# Altium PCB PCB1.PcbDoc
Units mil, origin at the board's own origin, x right, y up, seen from the top; angles counter-clockwise.
Board outline 7215.25 x 12370.99 mil, 2 copper layers (Top Layer, Bottom Layer), stack 23.2 mil thick; 54 components, 36 nets, 195 pads, 78 vias.
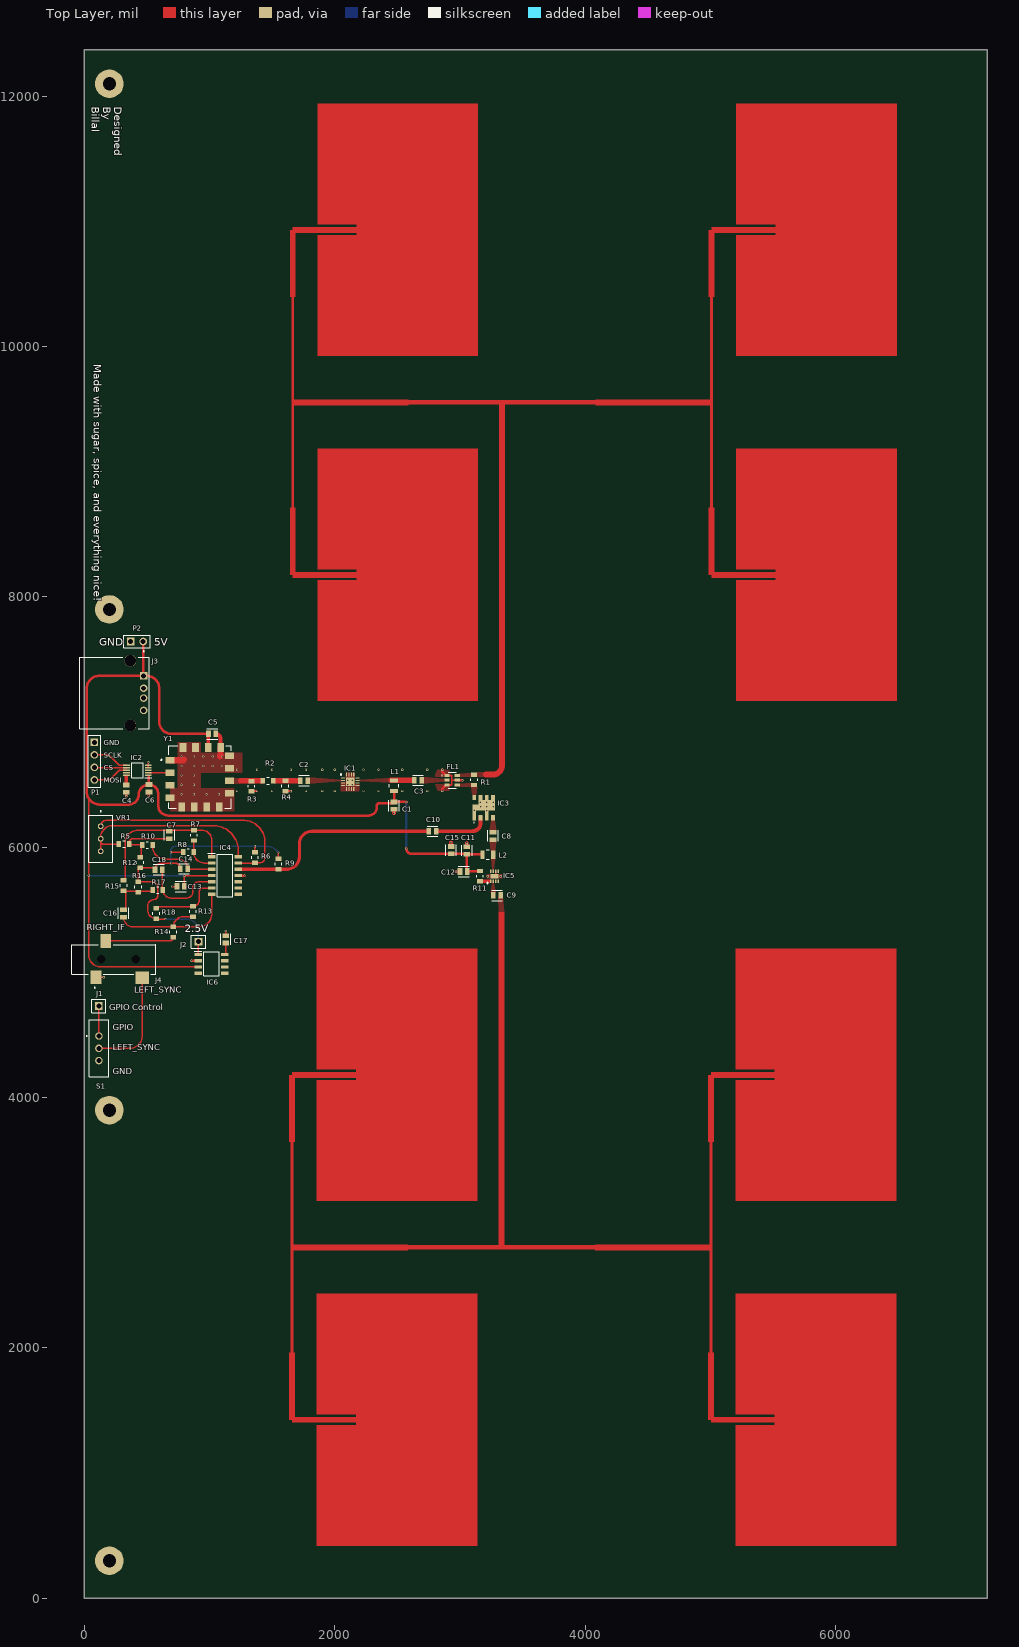
[diagram p0: Top Layer view]
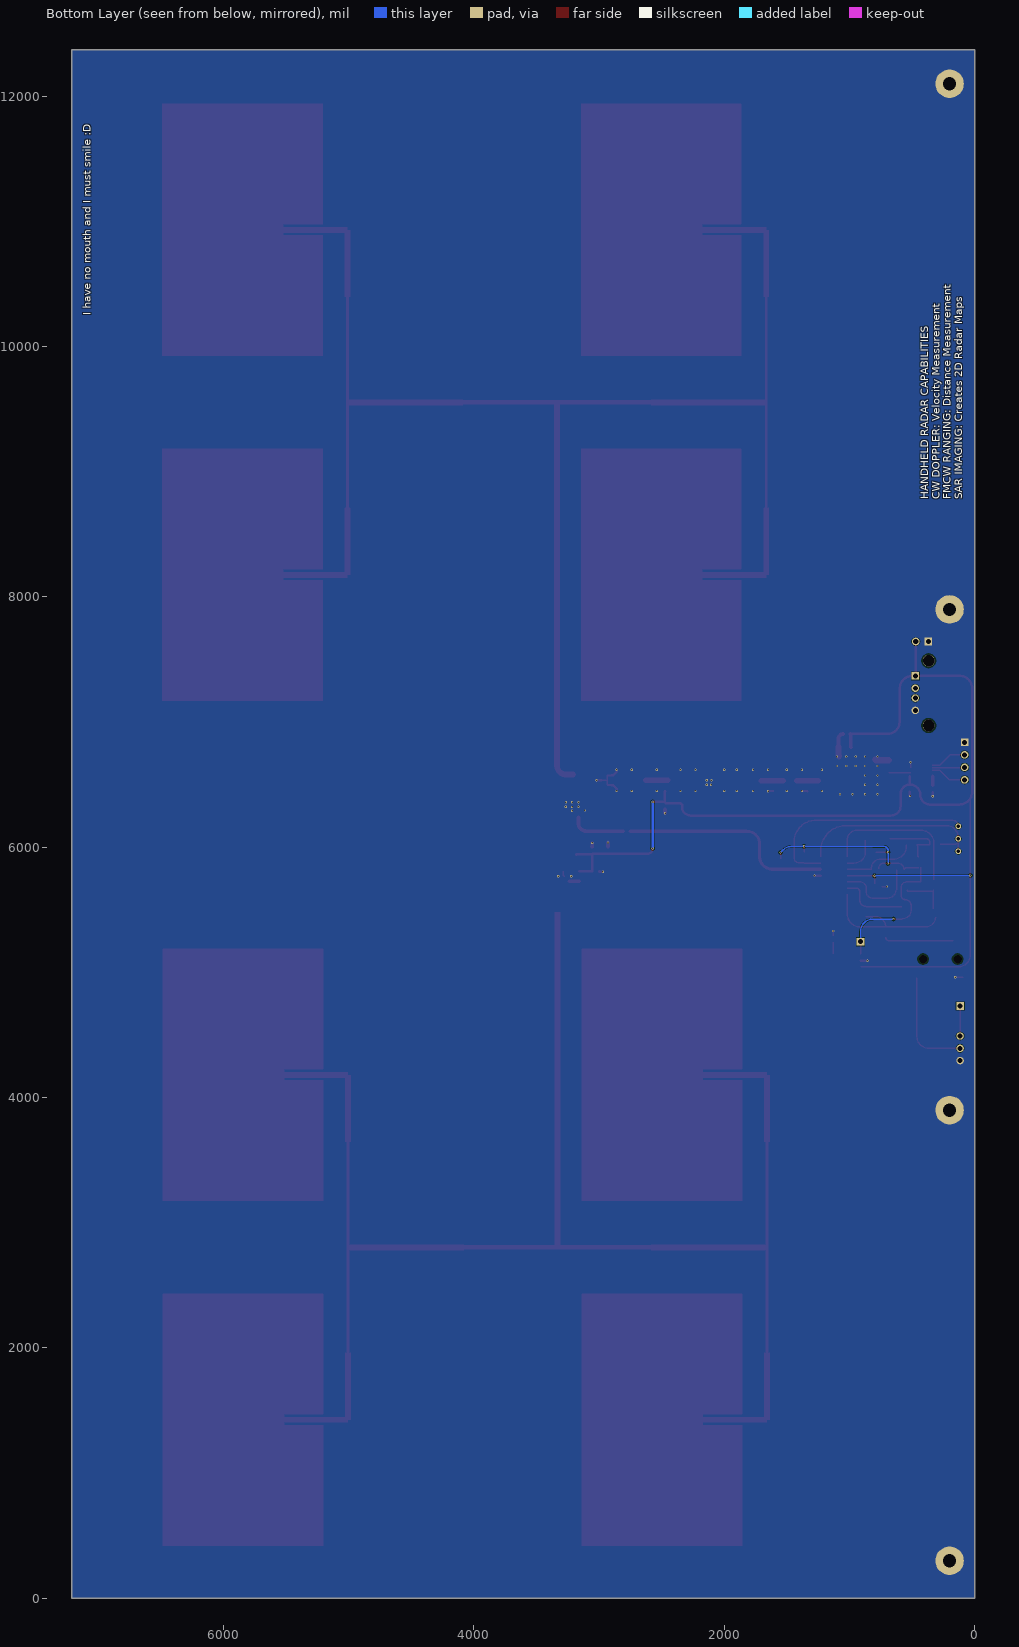
[diagram p1: Bottom Layer view, seen from below]
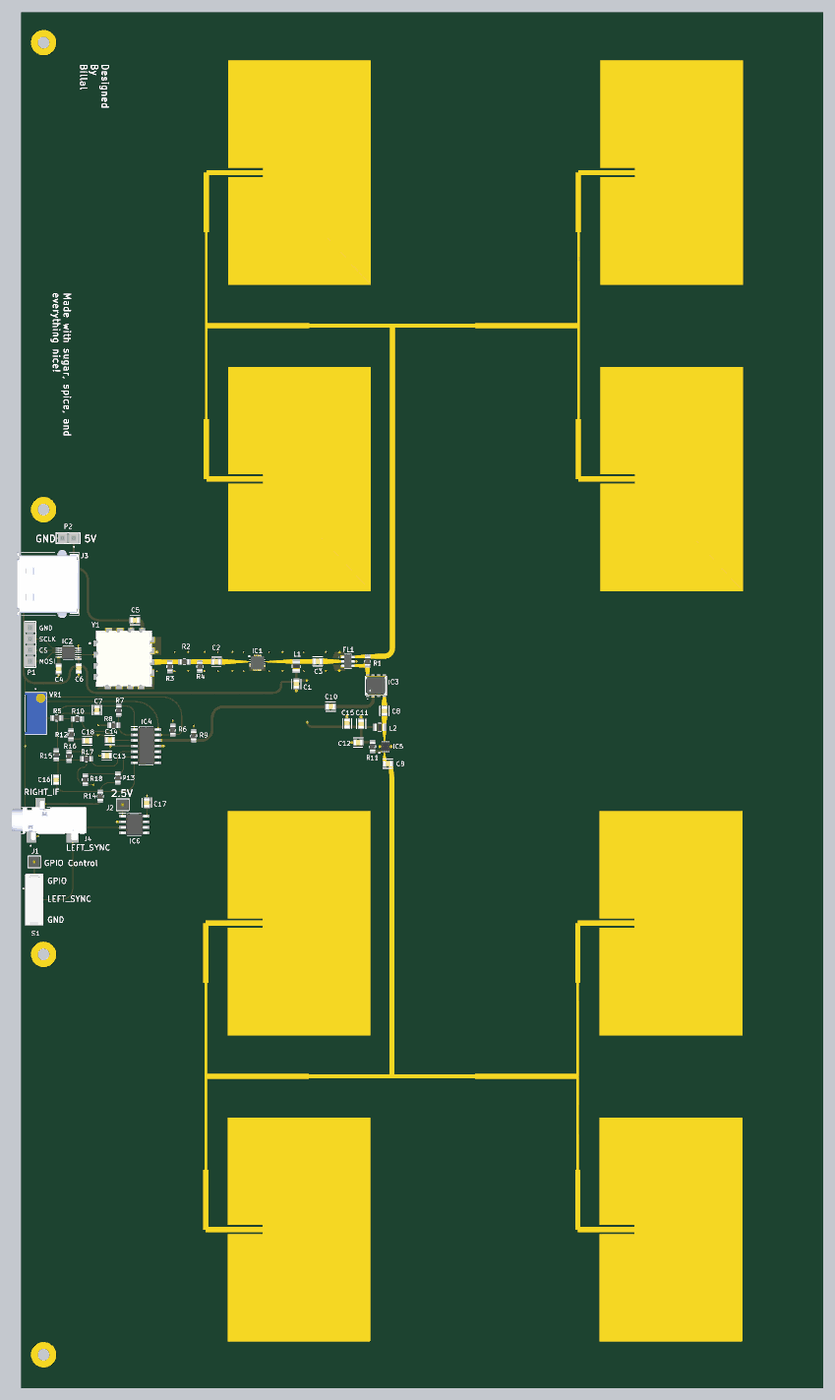
[diagram p2: 3D render of the assembled board from above, using the file's embedded part models]

## Layer stack, top to bottom
Top Solder: solder mask 0.6, Solder Resist, Dk 3.8
Top Layer: signal copper 1.6
Dielectric 1: dielectric 20, RO4350B, Dk 3.48
Bottom Layer: signal copper 1.6
Bottom Solder: solder mask 0.6, Solder Resist, Dk 3.8

## Board outline
-2,0.52 7213.25,0.52 7213.25,12371.51 -2,12371.51

## Design rules (kind name [scope] priority, off if disabled: settings)
Clearance Clearance_All [All] p1: gap=4 ignorepadtopadclearanceinfootprint=TRUE except(6: SMDPad-SMDPad; 12: Arc-Hole Track-Hole SMDPad-Hole THPad-Hole Via-Hole Fill-Hole Poly-Hole Region-Hole Text-Hole)
HoleSize [All] p1: absolutevalues=TRUE maxlimit=248 minlimit=6 maxpercent=80.000 minpercent=20.000
HoleToHoleClearance [All] p1: gap=8 allowstackedmicrovias=TRUE
MinimumSolderMaskSliver [All] p1 off: minsoldermaskwidth=4
NetAntennae [All] p1 off: netantennaetolerance=0
PolygonConnect J22_Shield_Thermal [IsPad And InComponent('J22') And InNet('GND')] p1: connectstyle=Relief reliefconductorwidth=10 reliefentries=2 polygonreliefangle="90 Angle" airgapwidth=10
PolygonConnect [All] p2: connectstyle=Direct reliefconductorwidth=10 reliefentries=4 polygonreliefangle="90 Angle" airgapwidth=10
RoutingVias [All] p1: holewidth=7.87 width=13.78 viastyle="Through Hole" minholewidth=5.91 minwidth=9.84 maxholewidth=248.03 maxwidth=259.84 viatemplateguid#1={7CD660F0-3084-4002-849E-F9D3F3D2032F} viatemplatename#1=v45h30(1)
SilkToSilkClearance [All] p1 off: silktosilkclearance=6
SilkToSolderMaskClearance [IsPad] p1 off: minsilkscreentomaskgap=6 clearancetoexposedcopper=FALSE
SolderMaskExpansion [All] p1: expansion=4 istentingtop=FALSE
SupplyNets "Schematic Supply Nets_6" [InNet('+2V5')] p1: voltage=0.000
SupplyNets "Schematic Supply Nets_16" [InNet('GND')] p2: voltage=0.000
SupplyNets "Schematic Supply Nets_4" [InNet('+5')] p3: voltage=0.000
Width Widthall [All] p1: maxlimit=500 minlimit=4 preferedwidth=10
24 further rules are at their usual default settings.

## Components (designator, comment, footprint, x,y, rotation, side; value= is the part's Value field where it differs from the comment)
C1 "10nF 0805" FP-C0805C103K8RACAUTO-MFG 2474.25,6332.51 r270 top
C2 "22pF 0805" FP-C0805C103K8RACAUTO-MFG 1755.25,6532.51 r0 top
C3 "22pF 0805" FP-C0805C103K8RACAUTO-MFG 2665.25,6535.51 r0 top
C4 "1uF 0805" FP-C0805C103K8RACAUTO-MFG 335.25,6468.51 r270 top
C5 "1uF 0805" FP-C0805C103K8RACAUTO-MFG 1021.25,6905.51 r0 top
C6 "1uF 0805" FP-C0805C103K8RACAUTO-MFG 516.25,6471.51 r270 top
C7 "1nF 0805" FP-C0805C103K8RACAUTO-MFG 679.25,6097.51 r270 top
C8 "100pF 0805" FP-C0805C103K8RACAUTO-MFG 3265.13,6090.69 r270 top
C9 "100pF 0805" FP-C0805C103K8RACAUTO-MFG 3296.63,5615.29 r0 top
C10 "1uF 0805" FP-C0805C103K8RACAUTO-MFG 2781.25,6127.51 r0 top
C11 "100pF 0805" FP-C0805C103K8RACAUTO-MFG 3056.25,5973.51 r90 top
C12 "100pF 0805" FP-C0805C103K8RACAUTO-MFG 3030.25,5806.51 r180 top
C13 "0.1uF 0805" FP-C0805C103K8RACAUTO-MFG 769.25,5687.51 r180 top
C14 "1nF 0805" FP-C0805C103K8RACAUTO-MFG 796.25,5828.51 r0 top
C15 "1uF 0805" FP-C0805C103K8RACAUTO-MFG 2930.25,5976.51 r90 top
C16 "1nF 0805" FP-C0805C103K8RACAUTO-MFG 312.25,5471.51 r90 top
C17 "1uF 0805" FP-C0805C103K8RACAUTO-MFG 1129.25,5264.51 r90 top
C18 "1nF 0805" FP-C0805C103K8RACAUTO-MFG 593.25,5821.51 r0 top
FL1 "SCN-2-27+" SCN227 2937.61,6535.49 r270 top
IC1 "TQP3M9038" QFN50P300X300X90-17N-D 2123.34,6522.67 r0 top
IC2 "DAC80501MDGSR" SOP50P490X110-10N 423.93,6615.17 r180 top
IC3 "SIM-43MH+" SIM43MH 3189.54,6317.26 r0 top
IC4 "OPA4197ID" SOIC127P600X175-14N 1123.16,5774.17 r0 top
IC5 "QPL9547TR7" SON50P200X200X95-9N-D 3275.96,5768.83 r90 top
IC6 "TLE2426CDR" SOIC127P600X175-8N 1016.25,5068.51 r0 top
J1 "GPIO Control" FP-TSW-101-07-L-S-MFG 115,4732 r0 top
J2 "TSW-101-07-L-S" FP-TSW-101-07-L-S-MFG 911.25,5245.51 r0 top
J3 "USB-A1HSW6" OST_USB-A1HSW6 367.25,7231.17 r270 top
J4 "SJ-3523-SMT-TR" SJ3523SMTTR -2.54,5106.51 r0 top
L1 "18nH  0805" IND_BOURNS_CW201212 2473.25,6491.51 r90 top
L2 "18nH  0805" IND_BOURNS_CW201212 3223.25,5941.51 r180 top
P1 "TSW-104-08-G-S" SMTC-TSW-104-08-X-S 80,6838 r270 top
P2 "TSW-102-26-L-S" SMTC-TSW-102-26-XX-S 370.25,7643.51 r0 top
R1 "100 Ohm 0805" FP-RT0805-MFG 3114.25,6538.51 r90 top value=75Ω
R2 "17.8 Ohm 0805" FP-RT0805-MFG 1466.25,6531.51 r0 top value=75Ω
R3 "294 Ohm 0805" FP-RT0805-MFG 1335.25,6487.51 r90 top value=75Ω
R4 "294 Ohm 0805" FP-RT0805-MFG 1605.25,6489.51 r90 top value=75Ω
R5 "8.45k Ohm 0805" FP-RT0805-MFG 317.25,6025.51 r180 top value=75Ω
R6 "220 Ohm 0805" FP-RT0805-MFG 1362.25,5918.51 r270 top value=75Ω
R7 "1k Ohm 0805" FP-RT0805-MFG 875.25,6095.51 r90 top value=75Ω
R8 "12.1k Ohm 0805" FP-RT0805-MFG 830.91,5961.51 r0 top value=75Ω
R9 "10k Ohm 0805" FP-RT0805-MFG 1550.25,5866.51 r90 top value=75Ω
R10 "7.15k Ohm 0805" FP-RT0805-MFG 503.25,6018.51 r0 top value=75Ω
R11 "3.32k Ohm 0805" FP-RT0805-MFG 3159.82,5768.83 r270 top value=75Ω
R12 "102k Ohm 0805" FP-RT0805-MFG 446.25,5877.51 r90 top value=75Ω
R13 "1k Ohm 0805" FP-RT0805-MFG 868.25,5486.51 r90 top value=75Ω
R14 "47k Ohm 0805" FP-RT0805-MFG 710.25,5322.51 r270 top value=75Ω
R15 "17.4k Ohm 0805" FP-RT0805-MFG 314.25,5694.51 r90 top value=75Ω
R16 "4.12k Ohm 0805" FP-RT0805-MFG 586.25,5658.51 r180 top value=75Ω
R17 "1.62k Ohm 0805" FP-RT0805-MFG 574.25,5471.51 r90 top value=75Ω
R18 "28k Ohm 0805" FP-RT0805-MFG 430.25,5682.17 r270 top value=75Ω
S1 "EG1218" SW_EG1218 116,4393.57 r270 top
VR1 "3296W-1-103LF" 3296W1503LF 130.25,6167.51 r90 top
Y1 "CVCO55CC-2328-2536" XTAL_CVCO55CC-2400-2400 923.05,6560.51 r0 top

## Footprints (in the part's own frame and the unit in brackets; to place one, negate y for a bottom-side part, rotate by r counter-clockwise, add the part's x,y. Pads: shape width x height; smd on the part's side, far side on the other; paste and mask are expansions set on the pad)
3296W1503LF [mm]
  round 1.15 hole 0.71: 1(0,0) 2(-2.54,0) 3(-5.08,0)
  silkscreen extent -7.3,-2.42 3.15,2.41, body extent -7.3,-2.41 2.22,2.41, height 11.54
FP-C0805C103K8RACAUTO-MFG [mm]
  rect 0.95x1.35 smd paste+0 mask+0: 1(-0.75,0) 2(0.75,0)
  silkscreen extent -1.1,-1.05 1.1,1.05, body extent -1.4,-0.85 1.4,0.85, height 0.25
FP-RT0805-MFG [mm]
  rect 0.9x1.2 smd paste+0 mask+0: 1(-1.05,0) 2(1.05,0)
  silkscreen extent -0.23,-0.67 0.23,0.67, body extent -1.6,-0.77 1.6,0.77, height 0.25
FP-TSW-101-07-L-S-MFG [mm]
  rect 1.57x1.57 hole 1.02 paste-2539.97 mask+0: 1(0,0)
  silkscreen extent -1.46,-1.34 1.46,1.34, body extent -1.56,-1.44 1.56,1.44, height 0.25
IND_BOURNS_CW201212 [mil]
  rect 34x67 smd paste+0 mask+0: 1(-42.5,0) 2(42.5,0)
  silkscreen extent -13,-38 13,38, body extent -46,-34 46,34, height 59
OST_USB-A1HSW6 [mm]
  rect 1.508x1.508 / inner round 1.508 / far side rect 1.508x1.508 hole 1: 1(-3.5,2.71)
  round 1.508 hole 1: 2(-1,2.71) 3(1,2.71) 4(3.5,2.71)
  round 2.38 hole 2.38 unplated: ""(-6.57,0) ""(6.57,0)
  silkscreen extent -8.61,-10.3 7.25,3.8, body extent -7.9,-10.29 7.9,3.81, height 7.6
QFN50P300X300X90-17N-D [mm]
  rect 0.8x0.25 smd: 1(-1.45,0.75) 2(-1.45,0.25) 3(-1.45,-0.25) 4(-1.45,-0.75) 9(1.45,-0.75) 10(1.45,-0.25) 11(1.45,0.25) 12(1.45,0.75)
  rect 0.25x0.8 smd: 5(-0.75,-1.45) 6(-0.25,-1.45) 7(0.25,-1.45) 8(0.75,-1.45) 13(0.75,1.45) 14(0.25,1.45) 15(-0.25,1.45) 16(-0.75,1.45)
  rect 1.75x1.75 smd: 17(0,0)
  silkscreen extent -1.97,1.38 -1.72,1.62, body extent -1.55,-1.55 1.55,1.55, height 0.9
SCN227 [mm]
  rect 0.61x1.07 smd: 1(-0.99,-1.025) 2(0,-1.025) 3(0.99,-1.025) 4(0.99,1.025) 5(0,1.025) 6(-0.99,1.025)
  silkscreen extent -1.6,-2.1 1.6,0.8, body extent -1.6,-1.5 1.6,1.5, height 1.17
SIM43MH [mm]
  rect 0.76x1.95 smd: 1(-1.905,-1.615) 3(0.635,-1.615)
  rect 0.76x1.09 smd: 2(-0.635,-2.045) 4(1.905,-2.045) 5(1.905,2.045) 6(0.635,2.045) 7(-0.635,2.045) 8(-1.905,2.045)
  rect 3.3x2.14 smd: 9(0.635,0.43)
  rect 1.27x1.28 smd: 10(-1.65,0)
  silkscreen extent -1.95,-3.1 -1.86,-3, body extent -2.54,-2.28 2.54,2.28, height 2.21
SJ3523SMTTR [mm]
  rect 2.2x2.8 smd: 1(2.4,-3.7) 3(4.4,3.7)
  rect 2.8x2.6 smd: 2(11.8,-3.8)
  round 0.85 hole 1.7 unplated: MH1(3.5,0) MH2(10.5,0)
  silkscreen extent -2.5,-5.9 14.5,3, body extent -2.11,-4.52 14.89,4.48, height 5.11
SMTC-TSW-102-26-XX-S [mm] ".025 SQ Post Terminal Strip Assembly, 1x2 Pins, Vertical, 2.54mm Pitch, Male"
  rect 1.55x1.55 hole 1.02: 1(0,0)
  round 1.55 hole 1.02: 2(2.54,0)
  silkscreen extent -1.46,-1.27 4,1.27, body extent -1.4,-1.27 3.81,1.27, height 8.38
SMTC-TSW-104-08-X-S [mm] ".025 SQ Post Terminal Strip Assembly, 1x4 Pins, Vertical, 2.54mm Pitch, Male"
  rect 1.55x1.55 hole 1.02: 1(0,0)
  round 1.55 hole 1.02: 2(2.54,0) 3(5.08,0) 4(7.62,0)
  silkscreen extent -1.46,-1.27 9.08,1.27, body extent -1.27,-1.27 8.89,1.27, height 8.38
SOIC127P600X175-8N [mm]
  rect 1.528x0.65 smd: 1(-2.711,1.905) 2(-2.711,0.635) 3(-2.711,-0.635) 4(-2.711,-1.905) 5(2.711,-1.905) 6(2.711,-0.635) 7(2.711,0.635) 8(2.711,1.905)
  silkscreen extent -3.47,-2.45 1.6,2.58, body extent -3.01,-2.45 3.01,2.45, height 1.63
SOIC127P600X175-14N [mm]
  rect 1.525x0.65 smd: 1(-2.712,3.81) 2(-2.712,2.54) 3(-2.712,1.27) 4(-2.712,0) 5(-2.712,-1.27) 6(-2.712,-2.54) 7(-2.712,-3.81) 8(2.712,-3.81) 9(2.712,-2.54) 10(2.712,-1.27) 11(2.712,0) 12(2.712,1.27) 13(2.712,2.54) 14(2.712,3.81)
  silkscreen extent -3.47,-4.33 1.6,4.48, body extent -3.01,-4.32 3.01,4.34, height 1.75
SON50P200X200X95-9N-D [mm]
  rect 0.75x0.3 smd: 1(-1,0.75) 2(-1,0.25) 3(-1,-0.25) 4(-1,-0.75) 5(1,-0.75) 6(1,-0.25) 7(1,0.25) 8(1,0.75)
  rect 0.85x1.65 smd: 9(0,0)
  silkscreen extent -1.5,1.27 -1.25,1.52, body extent -1.01,-1 1.01,1, height 0.85
SOP50P490X110-10N [mm]
  rect 1.4x0.3 smd: 1(-2.2,1) 2(-2.2,0.5) 3(-2.2,0) 4(-2.2,-0.5) 5(-2.2,-1) 6(2.2,-1) 7(2.2,-0.5) 8(2.2,0) 9(2.2,0.5) 10(2.2,1)
  silkscreen extent -2.9,-1.5 1.15,1.5, body extent -2.46,-1.5 2.46,1.5, height 1.1
SW_EG1218 [mm]
  round 1.508 hole 1 mask+0.102: 1(-2.5,0) 2(0,0) 3(2.5,0)
  silkscreen extent -5.8,-2.6 5.8,2, body extent -5.8,-2 5.8,2, height 7
XTAL_CVCO55CC-2400-2400 [mm]
  rect 1.83x1.33 smd: 1(-6.04,3.429) 2(-6.04,0.889) 3(-6.04,-1.651) 4(-6.04,-4.191) 9(6.04,-3.302) 10(6.04,-0.762) 11(6.04,1.778) 12(6.04,4.318)
  rect 1.33x1.83 smd: 5(-3.683,-6.04) 6(-1.143,-6.04) 7(1.397,-6.04) 8(3.937,-6.04) 13(4.191,6.04) 14(1.651,6.04) 15(-0.889,6.04) 16(-3.429,6.04)
  silkscreen extent -7.9,-6.35 6.35,6.35, body extent -6.35,-6.35 6.35,6.35, height 5.59

## Part data
C1 C2 C3 C4 C5 C6 C7 C8 C9 C10 C11 C12 C13 C14 C15 C16 C17 C18: library part CMP-00212-126448506-1, "C0805C103K8RACAUTO Cap, 0.01UF, 10V, Mlcc, 0805 Rohs Compliant: Yes", Capacitance=10nF, Case/Package=0805, Dielectric=X7R, Max Operating Temperature=125°C, Min Operating Temperature=-55°C, Tolerance=10%, Voltage Rating=10V, Height=880µm, Material=Ceramic, NexarPartId=126448506, RoHS=Compliant, Voltage Rating (DC)=10V
FL1: "Filter", Manufacturer_Name=Mini-Circuits, Mouser Part Number=139-SCN-2-27, Datasheet Link=https://www.minicircuits.com/WebStore/dashboardPdf?model=SCN-2-27%2B, Height=1.068mm, Manufacturer_Part_Number=SCN-2-27+, Mouser Price/Stock=https://www.mouser.co.uk/ProductDetail/Mini-Circuits/SCN-2-27%2b?qs=xZ%2FP%252Ba9zWqZ9BqpGqNwa3Q%3D%3D
IC1: "Integrated Circuit", Manufacturer_Name=Qorvo, Mouser Part Number=772-TQP3M9038, Datasheet Link=http://www.qorvo.com/products/d/da005557, Height=0.9mm, Manufacturer_Part_Number=TQP3M9038, Mouser Price/Stock=https://www.mouser.co.uk/ProductDetail/Qorvo/TQP3M9038?qs=ZyJ8JrQCoIZ8y9AEz%2F0DcQ%3D%3D
IC2: "Integrated Circuit", Manufacturer_Name="Texas Instruments", Mouser Part Number=595-DAC80501MDGSR, Arrow Part Number=DAC80501MDGSR, Arrow Price/Stock=https://www.arrow.com/en/products/dac80501mdgsr/texas-instruments.html?utm_currency=USD&region=nac, Datasheet Link=https://www.ti.com/lit/gpn/DAC80501, Height=1.1mm, Manufacturer_Part_Number=DAC80501MDGSR, Mouser Price/Stock=https://www.mouser.co.uk/ProductDetail/Texas-Instruments/DAC80501MDGSR?qs=%252B6g0mu59x7JZMs1JuGefUg%3D%3D
IC3: "Integrated Circuit", Manufacturer_Name=Mini-Circuits, Mouser Part Number=139-SIM-43MH, Datasheet Link=https://www.minicircuits.com/pdfs/SIM-43MH+.pdf, Height=2.2098mm, Manufacturer_Part_Number=SIM-43MH+, Mouser Price/Stock=https://www.mouser.co.uk/ProductDetail/Mini-Circuits/SIM-43MH%2b?qs=xZ%2FP%252Ba9zWqY1tFzO9OHPtQ%3D%3D
IC4: "Integrated Circuit", Manufacturer_Name="Texas Instruments", Mouser Part Number=595-OPA4197ID, Arrow Part Number=OPA4197ID, Arrow Price/Stock=https://www.arrow.com/en/products/opa4197id/texas-instruments?utm_currency=USD&region=nac, Datasheet Link=http://www.ti.com/lit/gpn/OPA4197, Height=1.75mm, Manufacturer_Part_Number=OPA4197ID, Mouser Price/Stock=https://www.mouser.co.uk/ProductDetail/Texas-Instruments/OPA4197ID?qs=LuYMPh7GGMRrQsevs5FGag%3D%3D
IC5: "Integrated Circuit", Manufacturer_Name=Qorvo, Mouser Part Number=772-QPL9547TR7, Datasheet Link=https://www.qorvo.com/products/d/da007268, Height=0.95mm, Manufacturer_Part_Number=QPL9547TR7, Mouser Price/Stock=https://www.mouser.co.uk/ProductDetail/Qorvo/QPL9547TR7?qs=7MVldsJ5UaxZMCnAEuCHXA%3D%3D
IC6: "Integrated Circuit", Manufacturer_Name="Texas Instruments", Mouser Part Number=595-TLE2426CDR, Arrow Part Number=TLE2426CDR, Arrow Price/Stock=https://www.arrow.com/en/products/tle2426cdr/texas-instruments.html?utm_currency=USD&region=nac, Datasheet Link=http://www.ti.com/lit/gpn/TLE2426, Height=1.75mm, Manufacturer_Part_Number=TLE2426CDR, Mouser Price/Stock=https://www.mouser.co.uk/ProductDetail/Texas-Instruments/TLE2426CDR?qs=JbBXx2IvYcd3mBRQbzOwQw%3D%3D
J1 J2: library part CMP-02766-001775-1, "CONN HEADER VERT 1POS", Color=Black, Flammability Rating="UL94 V-0", Max Current Rating=7.6A, Max Operating Temperature=125°C, Max Voltage Rating (AC)=550V, Min Operating Temperature=-55°C, Connector Type=Header, Contact Finish - Mating=GOLD, Contact Material=Bronze, Contact Mating Length=0.23inch, Contact Plating=Gold, Contact Shape=Square, Contact Type="Male Pin", Depth=2.54mm, Fastening Type=Pull, Gender=Male, Housing Color=Black, Housing Material=Polyester, Insulation Color=Black, Insulation Material=PBT, Lead Free="Lead Free", Length=2.54mm, Mount="Through Hole", Number of Contacts=1, Number of Positions=1, Number of Rows=1, Orientation=Straight, Packaging=Bulk, Radiation Hardening=No, Reach SVHC Compliant=Yes, RoHS Compliant=Yes, Series=TSW, Termination=Solder, Width=2.54mm
J3: Package=None, Availability=Unavailable, MF="{'manufacturer': u'On Shore Technology Inc.'}", MP=USB-A1HSW6, Price=None
J4: "Connector", Manufacturer_Name="Same Sky", Mouser Part Number=490-SJ-3523-SMT-TR, Arrow Part Number=SJ-3523-SMT-TR, Arrow Price/Stock=https://www.arrow.com/en/products/sj-3523-smt-tr_4/cui-devices.html?utm_currency=USD&region=nac, Datasheet Link=https://www.sameskydevices.com/product/resource/sj-352x-smt.pdf, Height=5.2mm, Manufacturer_Part_Number=SJ-3523-SMT-TR, Mouser Price/Stock=https://www.mouser.co.uk/ProductDetail/CUI-Devices/SJ-3523-SMT-TR?qs=WyjlAZoYn51zOHzJ3r4ZRA%3D%3D
L1 L2: library part CW201212-18NJ, "No Description Available", Manufacturer_Name="Bourns Electronics", Copyright="Copyright (C) 2026 Ultra Librarian. All rights reserved.", Manufacturer_Part_Number=CW201212-18NJ
P1: library part CMP-1024-00357-1, "0.025\" SQ Post Header, Through-hole, Vertical, -55 to 125 degC, 2.54 mm Pitch, 4-Pin, Male, RoHS", Manufacturer=Samtec, Temperature Range="-55 to 125 degC", ComponentLink1Description="Manufacturer URL", ComponentLink1URL=http://www.samtec.com, ComponentLink2Description=Datasheet, ComponentLink2URL=http://www.samtec.com/documents/webfiles/pdf/TSW_TH.PDF, ComponentLink3Description="Package Specification", ComponentLink3URL=http://www.samtec.com/documents/webfiles/cpdf/TSW-XXX-XX-XXX-X-XX-XXX-MKT.pdf, DatasheetVersion=F-214, Mounting Technology=Through-hole, Orientation=Vertical, PackageDescription=".025[0.64] SQ. Post Terminal Strip Assembly", PackageReference=TSW-104-08-X-S, PackageVersion="DM, 8/1988", PartNumber=TSW-104-08-G-S, Pitch="2.54 mm", RoHS=True
P2: library part CMP-1024-00330-1, "0.025\" SQ Post Header, Through-hole, Vertical, -55 to 125 degC, 2.54 mm Pitch, 2-Pin, Male, RoHS", Manufacturer=Samtec, Temperature Range="-55 to 125 degC", ComponentLink1Description="Manufacturer URL", ComponentLink1URL=http://www.samtec.com, ComponentLink2Description=Datasheet, ComponentLink2URL=http://www.samtec.com/documents/webfiles/pdf/TSW_TH.PDF, ComponentLink3Description="Package Specification", ComponentLink3URL=http://www.samtec.com/documents/webfiles/cpdf/TSW-XXX-XX-XXX-X-XX-XXX-MKT.pdf, DatasheetVersion=F-214, Mounting Technology=Through-hole, Orientation=Vertical, PackageDescription=".025[0.64] SQ. Post Terminal Strip Assembly", PackageReference=TSW-102-26-XX-S, PackageVersion="DM, 8/1988", PartNumber=TSW-102-26-L-S, Pitch="2.54 mm", RoHS=True
R1 R2 R3 R4 R5 R6 R7 R8 R9 R10 R11 R12 R13 R14 R15 R16 R17 R18: library part CMP-03412-013473-1, "RES SMD 75 OHM 0.5% 1/8W 0805", Manufacturer=Yageo, Manufacturer Part Number=RT0805DRD0775RL, Package=RT0805, Power Rating=0.125W, Resistance=75Ω, Temperature="-55°C to +155°C", Temperature Coefficient="25 ppm/°C", Temperature Range High=+155°C, Temperature Range Low=-55°C, Tolerance=0.01, Voltage Rating=150V, Automotive=No, Category=Res, ComponentLink2Description=Datasheet, ComponentLink2URL=http://www.yageo.com/documents/recent/PYu-RT_1-to-0.01_RoHS_L_9.pdf, Composition="Thin Film", Device Class L1="Passive Components", Device Class L2=Resistors, Device Class L3="Chip SMD Resistors", Digikey Description="RES SMD 75 OHM 0.5% 1/8W 0805", Footprint Url=http://www.yageo.com/exep/pages/download/literatures/PYu-R_Mount_10.pdf, Height=0.6mm, Ipc Land Pattern Name=RESC200125X50, Lead Free=Yes, Octopart=https://octopart.com/rt0805drd0775rl-yageo-1390155, RoHS=TRUE, Series=RT
S1: "Slide Switch, EG Series, SPDT, Non-Shorting, ON-ON, 200mA DC, 30VDC, PC Pin", Package=None, Check_prices=https://www.snapeda.com/parts/EG1218/E-Switch/view-part/?ref=eda, MF=E-Switch, MP=EG1218, SnapEDA_Link=https://www.snapeda.com/parts/EG1218/E-Switch/view-part/?ref=snap
VR1: "Variable Resistor", Manufacturer_Name=Bourns, Mouser Part Number=652-3296W-1-103LF, Arrow Part Number=3296W-1-103LF, Arrow Price/Stock=https://www.arrow.com/en/products/3296w-1-103lf/bourns.html?utm_currency=USD&region=europe, Datasheet Link=https://www.bourns.com/pdfs/3296.pdf, Height=10.28mm, Manufacturer_Part_Number=3296W-1-103LF, Mouser Price/Stock=https://www.mouser.co.uk/ProductDetail/Bourns/3296W-1-103LF?qs=CL3xLxiry19Id6AEaxYcng%3D%3D
Y1: library part CVCO55CC-2400-2400, "2400MHz Center Frequency 0.5 V ~ 4.5 V Voltage Controlled Oscillator 7 Â±2 dBm -25 2nd Harmonic Typ (dBc)", Package="QFN-16 Crystek Corporation", Check_prices=https://www.snapeda.com/parts/CVCO55CC-2400-2400/Crystek+Corporation/view-part/?ref=eda, Digi-Key_Part_Number=744-1546-ND, MF="Crystek Corporation", MP=CVCO55CC-2400-2400, Purchase-URL=https://pricing.snapeda.com/search/part/CVCO55CC-2400-2400/?ref=eda, SnapEDA_Link=https://www.snapeda.com/parts/CVCO55CC-2400-2400/Crystek+Corporation/view-part/?ref=snap

## Free pads (board coordinates)
  round 228.35 hole 106.3 mask+4.02: 11(200,300) 11(200,3900) 11(200,7900) 11(200,12100)

## Via types
v1: diameter 17.72, hole 11.81, Top Layer to Bottom Layer, 78 vias

## Nets (pads, with @x,y where several pads share a name; then routed paths per layer and width w, separated by ;. In a path a pad name is that pad's centre, name@x,y a point inside that pad or via, vN(x,y) a via of type N, cw(c..) or ccw(c..) an arc to the next point about the centre after c; other vN are vias at no path point)
2.4Ghz_Pre_PA: R2.1 R3.2 Y1.10 | length 173
  Top Layer w42.09: 1247.25,6531.51 1335.25,6531.51 R2.1@1420.25,6531.51
+2V5: C14.1 C18.1 IC6.1 J2.1 R6.1 R8.1 R9.2 R12.1 R17.1 R18.1 | length 2801.5
  Top Layer w10: R12.1@430.25,5839.17 R18.1 ccw(c431.25,5723.51) 431.25,5722.51 545.25,5722.51 cw(c545.25,5680.51) 587.25,5680.51 587.25,5613.51 cw(c556.25,5613.51) 556.25,5582.51 ccw(c556.25,5532.51) 506.25,5532.51 506.25,5498.17 ccw(c574.25,5498.17) 555.63,5432.77 R17.1 ccw(c577.91,5430.17) 577.91,5426.51 v1(648.25,5426.51) ; R12.1 550.02,5836.17 563.72,5822.47 C18.1 cw(c614.72,5821.51) 614.72,5872.51 722.72,5872.51 cw(c722.72,5828.51) C14.1 ; v1(691.25,5960.51) 788.57,5960.51 ccw(c788.57,5961.51) R8.1 ; IC6.1 909.52,5245.78 cw(c918.25,5245.78) J2.1@918.25,5254.51 ; R6.1 v1(1362.25,6007.75) ; R9.2 v1(1550.25,5958.25)
  Bottom Layer w10: v1(648.25,5426.51) 811.25,5426.51 cw(c811.25,5326.51) 911.25,5326.51 J2.1 ; v1(692.39,5870.89) 691.82,5871.45 691.82,5959.94 v1(691.25,5960.51) 691.25,5972.84 cw(c725.41,5972.84) 725.41,6007 810,6007 cw(c811.81,6005.19) 811.81,6007.75 v1(1362.25,6007.75) 1459.33,6007.75 cw(c1459.33,5907.75) 1530.05,5978.46 v1(1550.25,5958.25)
+5: C1.1 C5.1 C6.1 C11.1 C12.1 C13.1 C15.1 IC2.1 IC4.4 IC6.3 J3.1 L1.1 L2.2 P2.2 R11.1 Y1.14 | length 10201.8
  Top Layer w10: 33.25,6391.76 33.25,5143.51 ccw(c133.25,5143.51) 133.25,5043.51 IC6.3 ; C13.1@798.16,5709.09 799.25,5709.09 v1(799.25,5771.51) 801.34,5771.51 803.99,5774.17 IC4.4
  Top Layer w20: P2.2 472.1,7641.67 472.1,7370.81 J3.1 498,7368.97 cw(c498,7268.97) 598,7268.97 598,7005.51 ccw(c698,7005.51) 698,6905.51 C5.1 ; J3.1@473.94,7370.31 120,7370.31 ccw(c120,7270.31) 20,7270.31 20,6441.51 ccw(c120,6441.51) 120,6341.51 356.72,6341.51 ccw(c356.72,6418.04) 433.25,6418.04 cw(c516.25,6418.04) C6.1 ; 516.25,6567.51 C6.1 ; 2334.99,6304.57 cw(c2270.84,6319.34) 2270.84,6253.51 669.25,6253.51 cw(c669.25,6332.51) 590.25,6332.51 590.25,6427.04 ccw(c516.25,6427.04) C6.1 ; 2335.25,6304.51 2335.25,6330.51 cw(c2356.25,6330.51) 2356.25,6351.51 2463.72,6351.51 2464.2,6351.66 2466.75,6353.34 C1.1 ; L1.1 cw(c2473.25,6448.01) 2474.25,6448.01 C1.1 ; v1(2572.25,5990.51) ccw(c2615.78,5990.51) 2615.78,5946.98 C15.1 3053.25,5946.98 cw(c3053.25,5943.98) C11.1 ; v1(2572.25,6361.51) 2571.72,6362.04 C1.1 ; R11.1 3063.44,5810.17 ccw(c3063.44,5806.51) C12.1 cw(c3059.78,5810.04) 3056.25,5810.04 C11.1 ; L2.2 ccw(c3178.28,5941.51) 3178.28,5943.98 C11.1
  Top Layer w30: Y1.14 989.89,6800.15 989.89,6903.67 C5.1
  Bottom Layer w10: v1(34.39,5774.89) 35.86,5773.41 41.32,5773.41 43.22,5771.51 v1(799.25,5771.51)
  Bottom Layer w20: v1(2572.25,5990.51) v1(2572.25,6361.51)
CS: IC2.7 P1.3 | length 234.7
  Top Layer w10: P1.3@104.25,6637.51 ccw(c107.08,6637.51) 107.08,6634.68 337.15,6634.68 IC2.7
GND: C1.2 C4.2 C5.2 C6.2 C11.2 C12.2 C13.2 C15.2 C17.2 FL1.1 FL1.3 FL1.5 IC1.3 IC1.4 IC1.5 IC1.6 IC1.7 IC1.8 IC1.9 IC1.13 IC1.14 IC1.15 IC1.16 IC1.17 IC2.4 IC2.5 IC3.1 IC3.3 IC3.5 IC3.6 IC3.7 IC3.9 IC3.10 IC4.11 IC5.6 IC5.9 IC6.2 J3.4 J4.1 P1.1 P2.1 pad.11 R3.1 R4.1 S1.3 Y1.1 Y1.3 Y1.4 Y1.5 Y1.6 Y1.7 Y1.8 Y1.9 Y1.11 Y1.12 Y1.13 Y1.15 Y1.16 | length 1302.7
  Top Layer w10: J4.1 93.1,4962 v1(154,4962) ; IC2.4 ccw(c510.54,6635.8) 511.49,6635.8 v1(511.49,6678.49) ; v1(701,5686) 738.21,5686 C13.2 ; C17.2 ccw(c1129.25,5294.79) 1130,5294.79 v1(1130,5331) ; IC5.9 ccw(c3275.96,5778.68) 3285.8,5778.68 IC5.6
  Top Layer w15: R3.1 1335.25,6450 v1(1380,6450) ; R4.1 v1(1650,6448.17) ; FL1.3 2935,6496.51 2935,6535.49 ; FL1.1 2935,6574.46 2935,6535.49 ; FL1.5@2977.96,6535 FL1.5 2935,6535.49
  Top Layer w20: v1(335,6408) 335.25,6408 C4.2 ; v1(516,6410) 516.25,6410 C6.2 ; v1(856,5093) 856.51,5093.51 IC6.2 ; IC4.11 1230.09,5774 v1(1280,5774) ; v1(2860,6450) 2860,6468.31 2886.19,6494.5 2895.24,6494.5 FL1.3 ; v1(2860,6620) 2860,6602.66 2886.19,6576.47 2895.24,6576.47 FL1.1 ; v1(2969,5805) 2999.21,5805 ccw(c2999.21,5806.51) C12.2 ; FL1.5@2977.96,6535 v1(3020,6535)
  Top Layer w30: C5.2 cw(c1050.78,6868.24) 1088.05,6868.24 Y1.13 ; v1(2473,6272) 2473,6301.73 cw(c2474.25,6301.73) C1.2 ; v1(2929,6037) 2929,6007.29 ccw(c2930.25,6007.29) C15.2 ; v1(3055,6035) 3055,6004.29 ccw(c3056.25,6004.29) C11.2
  Top Layer w50: Y1.1 787.51,6695.51 ccw(c787.51,6701) 793,6701 ; 1083,6728 ccw(c1083,6733.05) 1088.05,6733.05 Y1.13
  other v1: 3223,5768 3327,5769 3216,6291 3113,6294 3216,6322 3266,6323 3165,6324 3164,6359 3216,6359 3265,6359 775.36,6424.15 875.36,6424.15 975.36,6424.15 1075.36,6424.15 1220,6450 1500,6450 1770,6450 1900,6450 2000,6450 2230,6450 2350,6450 2540,6450 2740,6450 775.36,6499.15 875.36,6499.15 2105,6500 2140,6500 2103,6535 2140,6535 775.36,6574.15 875.36,6574.15 1220,6620 1380,6620 1500,6620 1650,6620 1770,6620 1900,6620 2000,6620 2230,6620 2350,6620 2540,6620 2740,6620 775.36,6649.15 875.36,6649.15 950.36,6649.15 1025.36,6649.15 1100.36,6649.15 775.36,6724.15 875.36,6724.15 950.36,6724.15 1025.36,6724.15 1100.36,6724.15
LEFT_SYNC: J4.2 S1.2 | length 866.4
  Top Layer w10: S1.2 362.02,4393.57 ccw(c362.02,4493.57) 462.02,4493.57 J4.2
"Low Pass Filter 15Khz": C10.2 IC3.2 | length 438.9
  Top Layer w30: C10.2@2807.08,6128.51 3101.25,6128.51 ccw(c3101.25,6192.36) 3165.1,6192.36 3165.1,6197.85 IC3.2
MOSI: IC2.8 P1.4 | length 265.2
  Top Layer w10: P1.4@104.25,6537.51 201.25,6537.51 278.91,6615.17 IC2.8
NetC2_1: C2.1 R2.2 R4.2 | length 176.6
  Top Layer w42.09: 1527.64,6532.18 1704.25,6532.18
NetC2_2: C2.2 IC1.2
NetC3_1: C3.1 IC1.11 L1.2 | length 205.6
  Top Layer w42.09: L1.2@2481.25,6535.01 2452.25,6535.01 2618.56,6535.01 C3.1@2628.86,6535.01
NetC3_2: C3.2 FL1.2
NetC4_1: C4.1 IC2.10 | length 71.7
  Top Layer w30: C4.1@335.25,6495.04 335.25,6566.7
NetC7_2: C7.2 R5.1 R10.1 R12.2 | length 564.8
  Top Layer w10: R12.2 455.25,5927.85 455.25,6011.85 R10.1 365.59,6018.51 cw(c365.59,6025.51) R5.1 358.82,6044.13 cw(c385.98,6040.59) 385.98,6067.98 C7.2
NetC8_1: C8.1 IC3.4
NetC8_2: C8.2 IC5.7 L2.1
NetC9_1: C9.1 IC5.2
NetC10_1: C10.1 IC4.12 R9.1 | length 1739.3
  Top Layer w25: IC4.12 1484.25,5824.17 1617.25,5824.17 ccw(c1617.25,5924.17) 1717.25,5924.17 1717.25,6027.51 cw(c1817.25,6027.51) 1817.25,6127.51 C10.1
NetC14_2: C14.2 IC4.3 R10.2 | length 590.6
  Top Layer w10: R10.2 544.59,6005.51 ccw(c644.59,6005.51) 644.59,5905.51 748.78,5905.51 cw(c748.78,5828.51) C14.2 ; C14.2@821.78,5825.51 1015.04,5825.51 cw(c1015.04,5824.17) IC4.3
NetC16_1: C16.1 IC4.7 R13.1 R14.1 | length 1170.5
  Top Layer w10: C16.1 313.46,5428.28 ccw(c390.39,5441.98) 390.39,5363.85 R14.1 ; R13.1 791.57,5445.17 ccw(c791.57,5363.85) R14.1 ; IC4.7 1016.39,5463.85 cw(c916.39,5463.85) 916.39,5363.85 R14.1
NetC16_2: C16.2 R15.1 R16.2 R18.2 | length 365.5
  Top Layer w10: R15.1@326.25,5656.17 cw(c326.25,5653.17) 329.25,5653.17 C16.2@329.25,5507.51 ; R15.1@331.16,5649.17 431.25,5649.17 526.34,5649.17 527.06,5649.89 532.2,5649.89 R16.2@541.91,5659.61
NetC17_1: C17.1 IC6.8 | length 98
  Top Layer w10: IC6.8@1129.98,5148 1129.98,5237.72 cw(c1135.25,5237.72) C17.1@1135.25,5242.98
NetC18_2: C18.2 IC4.5 R16.1 | length 673.1
  Top Layer w10: R16.1@622.78,5661.15 C18.2 ; R16.1 ccw(c691.59,5658.51) 691.59,5594.51 819.02,5594.51 ccw(c819.02,5640.74) 865.25,5640.74 865.25,5671.97 cw(c917.44,5671.97) 917.44,5724.17 IC4.5
NetFL1_4: FL1.4 IC3.8 R1.1
NetIC2_2: IC2.2 Y1.2 | length 174.7
  Top Layer w10: IC2.2 Y1.2@685.22,6595.48
NetIC4_2: IC4.2 R7.1 R8.2 | length 288.4
  Top Layer w10: R7.1 875.25,5964.51 cw(c872.25,5964.51) R8.2 ccw(c959.6,5961.51) 959.6,5874.17 IC4.2
NetIC4_6: IC4.6 R13.2 R17.2 | length 548.8
  Top Layer w10: R17.2@581.25,5525.85 866.25,5525.85 ccw(c866.25,5527.85) R13.2 ccw(c868.25,5576.85) 917.25,5576.85 917.25,5644.51 cw(c946.91,5644.51) 946.91,5674.17 IC4.6
NetIC4_13: IC4.13 R6.2 VR1.1 | length 1800.8
  Top Layer w10: VR1.1 cw(c178.25,6167.51) 178.25,6215.51 1268.25,6215.51 cw(c1268.25,6041.51) 1442.25,6041.51 1442.25,5915.21 cw(c1404.22,5915.21) 1404.22,5877.17 R6.2 cw(c1359.24,5877.17) 1359.24,5874.17 IC4.13
NetIC4_14: IC4.14 R5.2 VR1.2 VR1.3 | length 1605.1
  Top Layer w10: VR1.3 VR1.2 130.25,6046.51 ccw(c151.25,6046.51) 151.25,6025.51 R5.2 ; VR1.2@130.85,6067.58 cw(c225.77,6078.02) 225.77,6173.51 1025.93,6173.51 cw(c1025.93,5969.51) 1229.93,5969.51 IC4.14
NetIC5_1: IC5.1 R11.2 | length 77.8
  Top Layer w30: R11.2 3168.44,5728.48 3237.57,5728.48
NetJ1_1: J1.1 S1.1 | length 240.6
  Top Layer w10: J1.1 115,4493 ccw(c116,4493) S1.1
Out_A: C7.1 IC4.1 R7.2 R15.2 | length 1221.6
  Top Layer w10: R15.2@326.25,5738.85 326.25,6034.51 cw(c426.25,6034.51) 426.25,6134.51 668.25,6134.51 863.25,6134.51 942.78,6134.51 cw(c942.78,6060.9) 1016.39,6060.9 IC4.1
RIGHT_IF: J4.3 R14.2 | length 556.1
  Top Layer w10: J4.3 681.26,5252.18 ccw(c681.26,5281.17) R14.2
"Rx Antenna": C9.2
SCLK: IC2.6 P1.2 | length 267.4
  Top Layer w10: P1.2@104.25,6737.51 196.25,6737.51 279.23,6654.54 IC2.6
"Tx Antenna": FL1.6 R1.2 | length 1749.7
  Top Layer w46.06: 3209.03,6581.51 3265,6581.51 ccw(c3265,6653.89) 3337.38,6653.89 3337.38,8233.94
pads on no net: IC1.1 IC1.10 IC1.12 IC2.3 IC2.9 IC4.8 IC4.9 IC4.10 IC5.3 IC5.4 IC5.5 IC5.8 IC6.4 IC6.5 IC6.6 IC6.7 J3. J3.2 J3.3 J4.MH1 J4.MH2

## Polygon pours and split planes (outlines as drawn)
GND on Top Layer "NONET_L-01_P-001" (solid, pour order 35): 2800,6505 2822,6450 2915,6450 2915,6505
GND on Top Layer "NONET_L-01_P-001" (solid, pour order 34): 2798,6565 2820,6620 2915,6620 2915,6565
NetFL1_4 on Top Layer "NONET_L-01_P-001" (solid, pour order 8): 3099.78,6419.43 3090.95,6482.52 3137.54,6482.32 3129.31,6417.46
GND on Top Layer "NONET_L-01_P-001" (solid, pour order 33): 2050,6449 2195,6449 2195,6520 2050,6520
GND on Top Layer "NONET_L-01_P-001" (solid, pour order 32): 2089,6595 2089,6450 2160,6450 2160,6595
GND on Top Layer "NONET_L-01_P-001" (solid, pour order 31): 3213,5785 3213,5753 3337,5753 3337,5785
GND on Top Layer "NONET_L-01_P-001" (solid, pour order 30): 1259.84,6594.49 1259.84,6755.91 749.02,6755.91 cw(c749.02,6756.89) 748.03,6756.89 748.03,6594.49
GND on Top Layer "NONET_L-01_P-001" (solid, pour order 29): 744.09,6325.79 930.12,6325.79 930.12,6836.61 cw(c931.1,6836.61) 931.1,6837.6 744.09,6837.6
GND on Top Layer "NONET_L-01_P-001" (solid, pour order 28): 687.01,6472.44 687.01,6286.42 1197.83,6286.42 cw(c1197.83,6285.43) 1198.82,6285.43 1198.82,6472.44
"Rx Antenna" on Top Layer "NONET_L-01_P-001" (solid, pour order 13): 3308.07,5607.51 3309.29,5478.51 3355.73,5478.51 3342.27,5607.51
NetC9_1 on Top Layer "NONET_L-01_P-001" (solid, pour order 12): 3260.37,5715.69 3248.09,5638.91 3285.8,5638.91 3271.85,5715.69
NetC8_2 on Top Layer "NONET_L-01_P-001" (solid, pour order 11): 3238.56,6045.41 3248.4,5973.56 3282.85,5973.56 3291.71,6045.41
NetC8_2 on Top Layer "NONET_L-01_P-001" (solid, pour order 10): 3260.34,5822 3248.4,5911.55 3282.85,5911.55 3271.91,5822
NetC8_1 on Top Layer "NONET_L-01_P-001" (solid, pour order 9): 3239.29,6135.96 3249.39,6215.69 3278.91,6215.69 3292.03,6135.96
"Tx Antenna" on Top Layer "NONET_L-01_P-001" (solid, pour order 7): 3137.25,6597.51 3209.03,6604.46 3209.03,6558.2 3137.25,6562.51 3137.25,6561.51
NetC3_1 on Top Layer "NONET_L-01_P-001" (solid, pour order 2): 2456.25,6556.51 2195.25,6537.51 2195.25,6527.51 2456.25,6513.51
NetFL1_4 on Top Layer "NONET_L-01_P-001" (solid, pour order 6): 2997.25,6504.51 2998.25,6508.51 3094.25,6514.51 3094.25,6479.51 2997.25,6484.51
"Tx Antenna" on Top Layer "NONET_L-01_P-001" (solid, pour order 4): 2995.25,6582.51 2996.25,6586.51 3094.25,6597.51 3093.25,6562.51 2995.25,6562.51
NetC3_2 on Top Layer "NONET_L-01_P-001" (solid, pour order 3): 2700.25,6508.77 2914.25,6526.87 2914.25,6544.15 2700.25,6562.25
NetC2_2 on Top Layer "NONET_L-01_P-001" (solid, pour order 1): 1794.25,6505.77 2051.25,6527.51 2051.25,6537.51 1794.25,6559.25
2.4Ghz_Pre_PA on Top Layer "NONET_L-01_P-001" (solid, pour order 0): 1190.25,6504.04 1296.25,6512.41 1296.25,6551.25 1190.25,6556.83
no net on Top Solder "NONET_L-01_P-001" (solid, pour order 23): 1194.25,6504.04 1300.25,6512.41 1300.25,6551.25 1194.25,6556.83
no net on Top Solder "NONET_L-01_P-001" (solid, pour order 26): 2704.25,6508.77 2918.25,6526.87 2918.25,6544.15 2704.25,6562.25
no net on Top Solder "NONET_L-01_P-001" (solid, pour order 25): 2460.25,6556.51 2199.25,6537.51 2199.25,6527.51 2460.25,6513.51
no net on Top Solder "NONET_L-01_P-001" (solid, pour order 24): 1798.25,6505.77 2055.25,6527.51 2055.25,6537.51 1798.25,6559.25
no net on Top Solder "NONET_L-01_P-001" (solid, pour order 22): 3308.46,5607.1 3309.67,5478.1 3356.12,5478.1 3342.65,5607.1
no net on Top Solder "NONET_L-01_P-001" (solid, pour order 21): 3260.75,5715.27 3248.47,5638.5 3286.19,5638.5 3272.24,5715.27
no net on Top Solder "NONET_L-01_P-001" (solid, pour order 19): 3260.6,5822.55 3248.79,5911.14 3283.23,5911.14 3272.41,5822.55
no net on Top Solder "NONET_L-01_P-001" (solid, pour order 20): 3238.94,6044.99 3248.79,5973.14 3283.23,5973.14 3292.09,6044.99
no net on Top Solder "NONET_L-01_P-001" (solid, pour order 18): 3239.07,6135.65 3249.16,6215.37 3278.69,6215.37 3291.81,6135.65
no net on Top Solder "NONET_L-01_P-001" (solid, pour order 17): 3099.77,6418.52 3090.94,6481.61 3137.53,6481.41 3129.29,6416.55
no net on Top Solder "NONET_L-01_P-001" (solid, pour order 16): 2997.68,6504.49 2998.68,6508.49 3094.68,6514.49 3094.68,6479.49 2997.68,6484.49
no net on Top Solder "NONET_L-01_P-001" (solid, pour order 15): 2995.68,6582.49 2996.68,6586.49 3094.68,6597.49 3093.68,6562.49 2995.68,6562.49
no net on Top Solder "NONET_L-01_P-001" (solid, pour order 14): 3137.98,6597.46 3209.76,6604.41 3209.76,6558.15 3137.98,6562.46 3137.98,6561.46
GND on Bottom Layer "NONET_L-01_P-001" (solid, pour order 27): -2,12371.51 7213.25,12371.51 7212.89,0.89 -2,0

## Other copper
Top Layer:
  region net "Tx Antenna": 5520.49,11940 5520.49,9923.86 6491.95,9923.86 6491.95,11940
  region net "Rx Antenna": 2168.9,5189.4 2168.9,3173.26 3140.35,3173.26 3140.35,5189.4
  region net "Rx Antenna": 2168.9,2433.5 2168.9,417.35 3140.35,417.35 3140.35,2433.5
  region net "Rx Antenna": 1855.91,2433.5 1855.91,1466.76 2202,1466.76 2202,2433.5
  region net "Rx Antenna": 1855.91,4139.99 1855.91,3173.26 2209,3173.26 2209,4139.99
  region net "Rx Antenna": 1658.86,4204.36 1658.86,4158.3 2181,4158.3 2181,4204.36
  region net "Rx Antenna": 1658.86,1448.46 1658.86,1402.39 2194,1402.39 2194,1448.46
  region net "Rx Antenna": 1855.91,5189.4 1855.91,4222.67 2196,4222.67 2196,5189.4
  region net "Rx Antenna": 1658.86,2826.41 1658.86,2780.35 2584.45,2780.35 2584.45,2826.41
  region net "Rx Antenna": 1855.91,1384.09 1855.91,417.35 2212,417.35 2212,1384.09
  region net "Rx Antenna": 2584.06,2821.88 2584.06,2784.87 3332.48,2784.87 3332.48,2821.88
  region net "Rx Antenna": 3309.25,5482.51 3309.25,2802.98 3355.31,2802.98 3355.31,5482.51
  region net "Rx Antenna": 5005.32,1448.46 5005.32,1402.39 5523,1402.39 5523,1448.46
  region net "Rx Antenna": 4982.48,4181.53 4982.48,3644.91 5028.54,3644.91 5028.54,4181.53
  region net "Rx Antenna": 4080.12,2826.41 4080.12,2780.35 5005.71,2780.35 5005.71,2826.41
  region net "Rx Antenna": 4982.48,1961.84 4982.48,1425.23 5028.54,1425.23 5028.54,1961.84
  region net "Rx Antenna": 3332.09,2821.88 3332.09,2784.87 4080.51,2784.87 4080.51,2821.88
  region net "Rx Antenna": 5515.35,2433.5 5515.35,417.35 6486.81,417.35 6486.81,2433.5
  region net "Rx Antenna": 5202.36,2433.5 5202.36,1466.76 5543,1466.76 5543,2433.5
  region net "Rx Antenna": 5202.36,1384.09 5202.36,417.35 5579,417.35 5579,1384.09
  region net "Rx Antenna": 5202.36,4139.99 5202.36,3173.26 5564,3173.26 5564,4139.99
  region net "Rx Antenna": 4994.19,2803.57 4994.19,1961.45 5016.83,1961.45 5016.83,2803.57
  region net "Rx Antenna": 5515.35,5189.4 5515.35,3173.26 6486.81,3173.26 6486.81,5189.4
  region net "Rx Antenna": 4994.19,3645.31 4994.19,2803.18 5016.83,2803.18 5016.83,3645.31
  region net "Rx Antenna": 5005.32,4204.36 5005.32,4158.3 5532,4158.3 5532,4204.36
  region net "Rx Antenna": 5202.36,5189.4 5202.36,4222.67 5600,4222.67 5600,5189.4
  region net "Rx Antenna": 1647.74,3645.31 1647.74,2803.18 1670.37,2803.18 1670.37,3645.31
  region net "Rx Antenna": 1647.74,2803.57 1647.74,1961.45 1670.37,1961.45 1670.37,2803.57
  region net "Rx Antenna": 1636.02,4181.53 1636.02,3644.91 1682.09,3644.91 1682.09,4181.53
  region net "Rx Antenna": 1636.02,1961.84 1636.02,1425.23 1682.09,1425.23 1682.09,1961.84
  region net "Tx Antenna": 3314.35,9572.48 3314.35,6895.41 3360.41,6895.41 3360.41,9572.48
  region net "Tx Antenna": 1861.05,11940 1861.05,10973.27 2192,10973.27 2192,11940
  region net "Tx Antenna": 1652.88,10395.9 1652.88,9553.78 1675.51,9553.78 1675.51,10395.9
  region net "Tx Antenna": 1641.16,10932.12 1641.16,10395.51 1687.23,10395.51 1687.23,10932.12
  region net "Tx Antenna": 1664,10954.96 1664,10908.9 2200,10908.9 2200,10954.96
  region net "Tx Antenna": 5207.5,11940 5207.5,10973.27 5616,10973.27 5616,11940
  region net "Tx Antenna": 2174.04,11940 2174.04,9923.86 3145.49,9923.86 3145.49,11940
  region net "Tx Antenna": 4999.33,10395.9 4999.33,9553.78 5021.97,9553.78 5021.97,10395.9
  region net "Tx Antenna": 5010.46,10954.96 5010.46,10908.9 5547,10908.9 5547,10954.96
  region net "Tx Antenna": 5207.5,10890.59 5207.5,9923.86 5574,9923.86 5574,10890.59
  region net "Tx Antenna": 1861.05,10890.59 1861.05,9923.86 2237,9923.86 2237,10890.59
  region net "Tx Antenna": 4987.62,10932.12 4987.62,10395.51 5033.68,10395.51 5033.68,10932.12
  region net "Tx Antenna": 1861.05,8134.68 1861.05,7167.95 2205,7167.95 2205,8134.68
  region net "Tx Antenna": 1641.16,8712.44 1641.16,8175.82 1687.23,8175.82 1687.23,8712.44
  region net "Tx Antenna": 1861.05,9184.09 1861.05,8217.36 2224,8217.36 2224,9184.09
  region net "Tx Antenna": 1664,9577.01 1664,9530.94 2589.59,9530.94 2589.59,9577.01
  region net "Tx Antenna": 1652.88,9554.17 1652.88,8712.05 1675.51,8712.05 1675.51,9554.17
  region net "Tx Antenna": 5207.5,8134.68 5207.5,7167.95 5616,7167.95 5616,8134.68
  region net "Tx Antenna": 5207.5,9184.09 5207.5,8217.36 5660,8217.36 5660,9184.09
  region net "Tx Antenna": 4987.62,8712.44 4987.62,8175.82 5033.68,8175.82 5033.68,8712.44
  region net "Tx Antenna": 3337.23,9572.48 3337.23,9535.47 4085.65,9535.47 4085.65,9572.48
  region net "Tx Antenna": 5010.46,8199.05 5010.46,8152.99 5541,8152.99 5541,8199.05
  region net "Tx Antenna": 2174.04,9184.09 2174.04,7167.95 3145.49,7167.95 3145.49,9184.09
  region net "Tx Antenna": 5520.49,9184.09 5520.49,7167.95 6491.95,7167.95 6491.95,9184.09
  region net "Tx Antenna": 1664,8199.05 1664,8152.99 2192,8152.99 2192,8199.05
  region net "Tx Antenna": 4999.33,9554.17 4999.33,8712.05 5021.97,8712.05 5021.97,9554.17
  region net "Tx Antenna": 2589.2,9572.48 2589.2,9535.47 3337.62,9535.47 3337.62,9572.48
  region net "Tx Antenna": 4085.26,9577.01 4085.26,9530.94 5010.85,9530.94 5010.85,9577.01

## Silkscreen, mask and mechanical layers (free items; w line width, h text height)
Top Overlay:
  text "Designed / By / Billal" at 60,11915 h60 r270
  text "Made with sugar, spice, and everything nice!" at 74,9857 h60 r270
  text "GND" at 120,7610 h60
  text "5V" at 560,7610 h60
  text "GND" at 156,6816 h40
  text "SCLK" at 156,6716 h40
  text "CS" at 156,6616 h40
  text "MOSI" at 156,6516 h40
  text "RIGHT_IF" at 18,5336.33 h50
  text "2.5V" at 800,5320 h60
  text "LEFT_SYNC" at 398,4836.33 h50
  text "GPIO Control" at 198,4698 h50
  text "GPIO" at 228,4538 h50
  text "LEFT_SYNC" at 228,4376.33 h50
  text "GND" at 228,4188 h50
Bottom Overlay:
  text "I have no mouth and I must smile :D" at 7060,10250 h60 r270
  text "HANDHELD RADAR CAPABILITIES / CW DOPPLER: Velocity Measurement / FMCW RANGING: Distance Measurement / SAR IMAGING: Creates 2D Radar Maps" at 100,8780 h60 r270
Top Solder:
  region: 3314.25,9558.58 3314.25,6652.51 3360.31,6652.51 3360.31,9558.58
  region: 1636.13,1961.68 1636.13,1425.07 1682.2,1425.07 1682.2,1961.68
  region: 1636.13,4181.37 1636.13,3644.76 1682.2,3644.76 1682.2,4181.37
  region: 1647.85,2803.42 1647.85,1961.29 1670.48,1961.29 1670.48,2803.42
  region: 1647.85,3645.15 1647.85,2803.02 1670.48,2803.02 1670.48,3645.15
  region: 3309.36,5482.35 3309.36,2802.83 3355.43,2802.83 3355.43,5482.35
  region: 2584.17,2821.72 2584.17,2784.72 3332.59,2784.72 3332.59,2821.72
  region: 1856.02,1383.93 1856.02,417.2 2169.01,417.2 2169.01,1383.93
  region: 1658.97,2826.25 1658.97,2780.19 2584.56,2780.19 2584.56,2826.25
  region: 1856.02,5189.24 1856.02,4222.51 2169.01,4222.51 2169.01,5189.24
  region: 1658.97,1448.3 1658.97,1402.24 2169.6,1402.24 2169.6,1448.3
  region: 1658.97,4204.2 1658.97,4158.14 2169.6,4158.14 2169.6,4204.2
  region: 1856.02,4139.83 1856.02,3173.1 2169.01,3173.1 2169.01,4139.83
  region: 2169.01,2433.34 2169.01,417.2 3140.46,417.2 3140.46,2433.34
  region: 2169.01,5189.24 2169.01,3173.1 3140.46,3173.1 3140.46,5189.24
  region: 1856.02,2433.34 1856.02,1466.61 2169.01,1466.61 2169.01,2433.34
  region: 5202.47,5189.24 5202.47,4222.51 5515.46,4222.51 5515.46,5189.24
  region: 5005.43,4204.2 5005.43,4158.14 5516.06,4158.14 5516.06,4204.2
  region: 4994.3,3645.15 4994.3,2803.02 5016.94,2803.02 5016.94,3645.15
  region: 5515.46,5189.24 5515.46,3173.1 6486.92,3173.1 6486.92,5189.24
  region: 4994.3,2803.42 4994.3,1961.29 5016.94,1961.29 5016.94,2803.42
  region: 5202.47,4139.83 5202.47,3173.1 5515.46,3173.1 5515.46,4139.83
  region: 5202.47,1383.93 5202.47,417.2 5515.46,417.2 5515.46,1383.93
  region: 5202.47,2433.34 5202.47,1466.61 5515.46,1466.61 5515.46,2433.34
  region: 3332.2,2821.72 3332.2,2784.72 4080.62,2784.72 4080.62,2821.72
  region: 4982.59,1961.68 4982.59,1425.07 5028.65,1425.07 5028.65,1961.68
  region: 4080.23,2826.25 4080.23,2780.19 5005.82,2780.19 5005.82,2826.25
  region: 4982.59,4181.37 4982.59,3644.76 5028.65,3644.76 5028.65,4181.37
  region: 5005.43,1448.3 5005.43,1402.24 5516.06,1402.24 5516.06,1448.3
  region: 5515.46,2433.34 5515.46,417.2 6486.92,417.2 6486.92,2433.34
  region: 1861.05,8134.68 1861.05,7167.95 2174.04,7167.95 2174.04,8134.68
  region: 1652.88,9554.17 1652.88,8712.05 1675.51,8712.05 1675.51,9554.17
  region: 1664,8199.05 1664,8152.99 2174.63,8152.99 2174.63,8199.05
  region: 1861.05,9184.09 1861.05,8217.36 2174.04,8217.36 2174.04,9184.09
  region: 1641.16,8712.44 1641.16,8175.82 1687.23,8175.82 1687.23,8712.44
  region: 2174.04,9184.09 2174.04,7167.95 3145.49,7167.95 3145.49,9184.09
  region: 5520.49,11940 5520.49,9923.86 6491.95,9923.86 6491.95,11940
  region: 5207.5,8134.68 5207.5,7167.95 5520.49,7167.95 5520.49,8134.68
  region: 4999.33,10395.9 4999.33,9553.78 5021.97,9553.78 5021.97,10395.9
  region: 5010.46,10954.96 5010.46,10908.9 5521.09,10908.9 5521.09,10954.96
  region: 5207.5,10890.59 5207.5,9923.86 5520.49,9923.86 5520.49,10890.59
  region: 4987.62,10932.12 4987.62,10395.51 5033.68,10395.51 5033.68,10932.12
  region: 5207.5,9184.09 5207.5,8217.36 5520.49,8217.36 5520.49,9184.09
  region: 4987.62,8712.44 4987.62,8175.82 5033.68,8175.82 5033.68,8712.44
  region: 5010.46,8199.05 5010.46,8152.99 5521.09,8152.99 5521.09,8199.05
  region: 5520.49,9184.09 5520.49,7167.95 6491.95,7167.95 6491.95,9184.09
  region: 5207.5,11940 5207.5,10973.27 5520.49,10973.27 5520.49,11940
  region: 4999.33,9554.17 4999.33,8712.05 5021.97,8712.05 5021.97,9554.17
  region: 3337.23,9572.48 3337.23,9535.47 4085.65,9535.47 4085.65,9572.48
  region: 1641.16,10932.12 1641.16,10395.51 1687.23,10395.51 1687.23,10932.12
  region: 1664,10954.96 1664,10908.9 2174.63,10908.9 2174.63,10954.96
  region: 4085.26,9577.01 4085.26,9530.94 5010.85,9530.94 5010.85,9577.01
  region: 2174.04,11940 2174.04,9923.86 3145.49,9923.86 3145.49,11940
  region: 1861.05,10890.59 1861.05,9923.86 2174.04,9923.86 2174.04,10890.59
  region: 1664,9577.01 1664,9530.94 2589.59,9530.94 2589.59,9577.01
  region: 2589.2,9572.48 2589.2,9535.47 3337.62,9535.47 3337.62,9572.48
  region: 1861.05,11940 1861.05,10973.27 2174.04,10973.27 2174.04,11940
  region: 1652.88,10395.9 1652.88,9553.78 1675.51,9553.78 1675.51,10395.9
  lines w42.09: 1251.25,6531.51 1339.25,6531.51 1424.25,6531.51 ; 1531.64,6532.18 1708.25,6532.18 ; 2456.25,6535.01 2622.56,6535.01
  lines w46.06: 3209.76,6581.46 3265.73,6581.46 ccw(c3265.73,6653.83) 3338.1,6653.83